# EAGLE board brakelight_V3 (EAGLE 9.5.2)
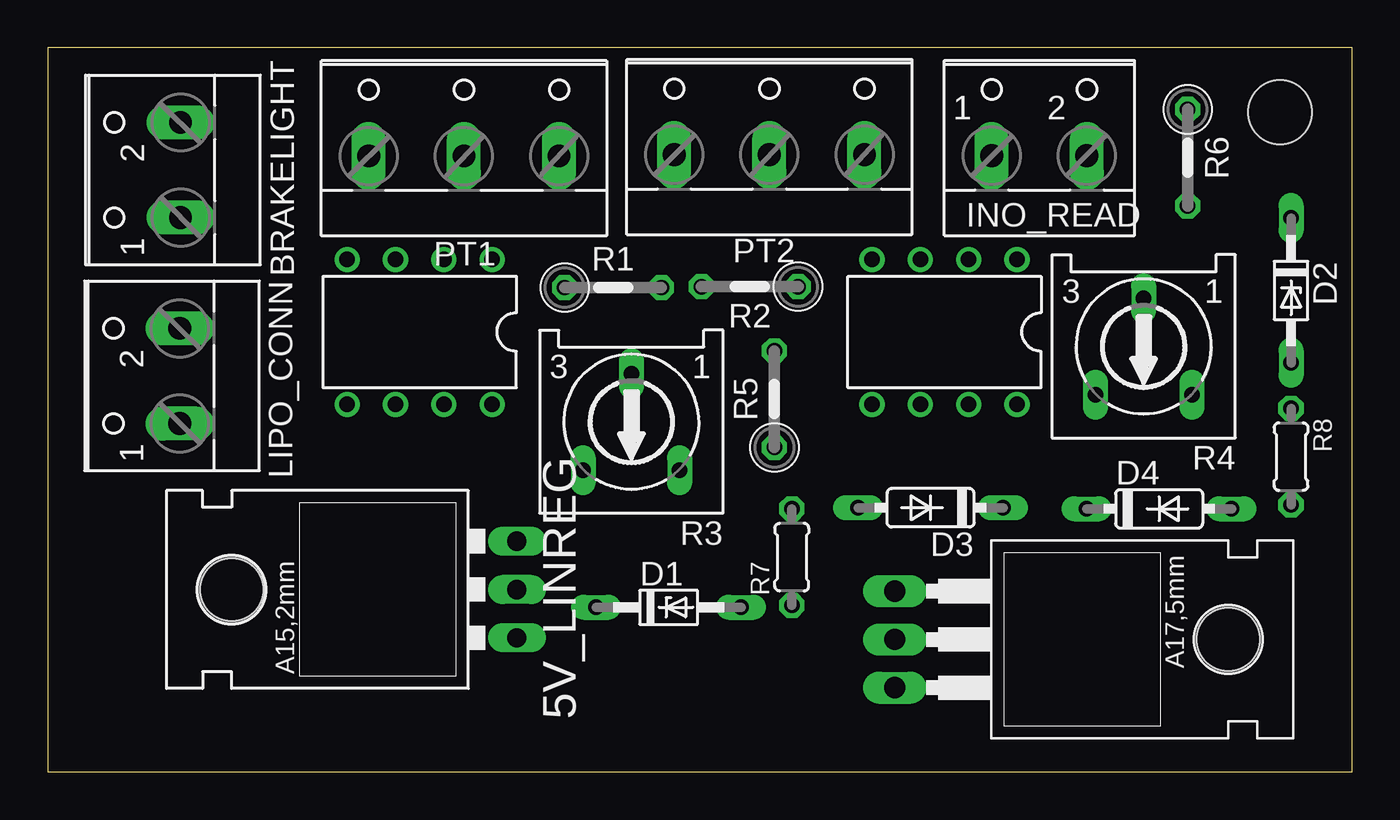
[diagram p0: board, top side]
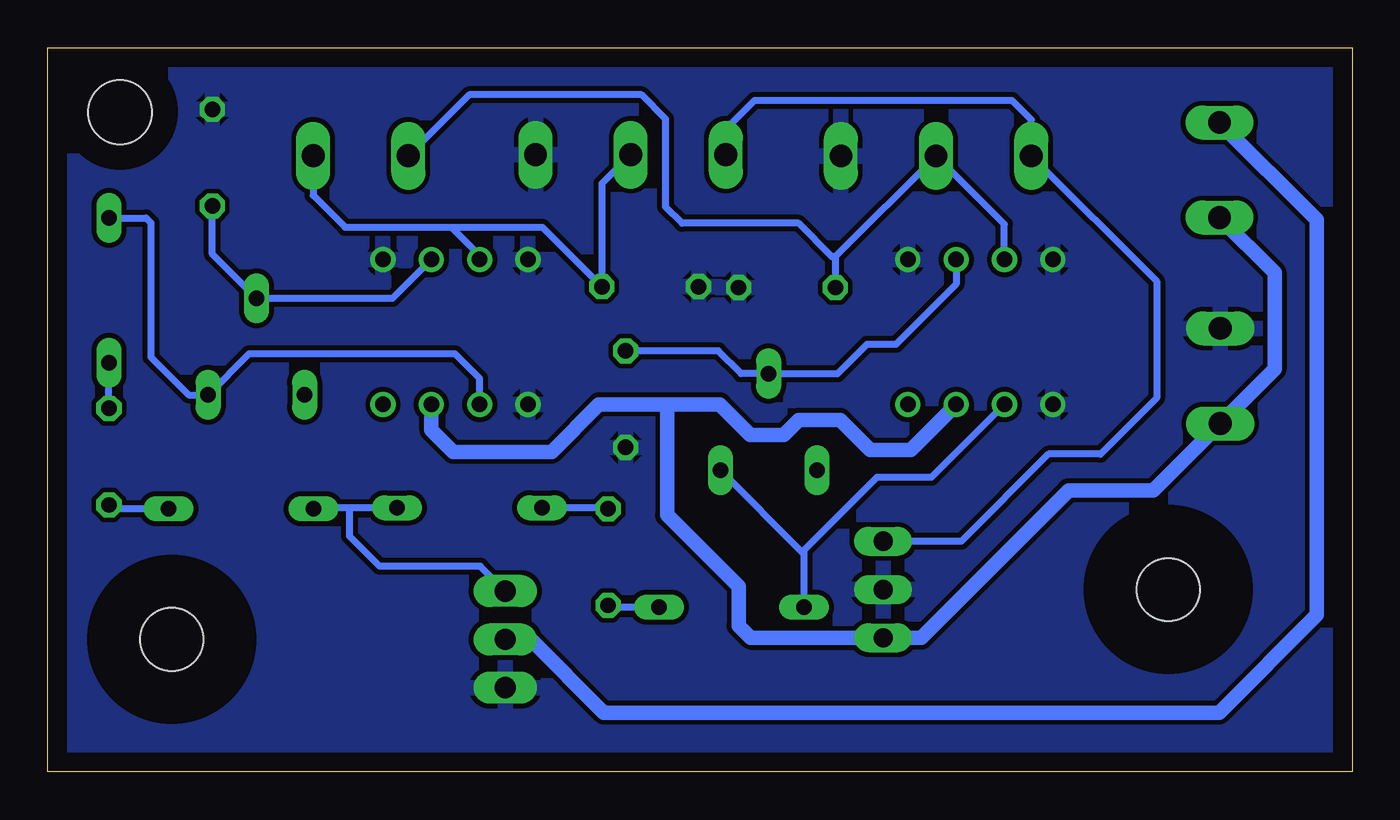
[diagram p1: board, bottom side, seen from below]

Size 68.58 x 38.1 mm. Coordinates in mm from the lower left corner, seen from the top.
Outline: 0,0 68.58,0 68.58,38.1 0,38.1 0,0
Copper layers (1*16): Top 0.035mm / dielectric 1.5mm / Bottom 0.035mm
Design rules "default": minimum track width 6mil, minimum drill 0.35mm, track to track 6mil, track to pad 6mil, pad to pad 6mil, via to via 6mil, smd to smd 6mil, copper to edge 40mil, drill to drill 6mil, minimum pad ring 10mil, minimum via ring 8mil, stop-mask expansion 4mil, vias tented up to drill 0mil, thermal gap 10mil
Holes 3.35 mm at 64.77,34.7
bRestrict: area 62,31.9 to 67.6,37.5
vRestrict: area 62,31.9 to 67.6,37.5

## Footprints (pad centres in the part's own frame; a part is rotated, then mirrored left to right if it is on the bottom)
78XXL = drill 1.016 long: GND 0,-3.81; IN -2.54,-3.81; OUT 2.54,-3.81 | hole 3.302: 0,11.176
W237-102 = drill 1.194 long: 1 -2.5,-1.27; 2 2.5,-1.27
DO34Z7 = drill 0.813 long: A 3.81,0; C -3.81,0
DO35-7 = drill 0.813 long: A 3.81,0; C -3.81,0
W237-103 = drill 1.194 long: 1 -5,-1.29; 2 0,-1.29; 3 5,-1.29
TO220 = drill 1.118 long: 1 -2.54,-6.35; 2 0,-6.35; 3 2.54,-6.35 | hole 3.302: 0,11.176
0207/5V = drill 0.813 octagon: 1 -2.54,0; 2 2.54,0
RS3 = drill 0.813 long: A -2.54,2.54; E 2.54,2.54; S 0,-2.54
0204/5 = drill 0.813 octagon: 1 -2.54,0; 2 2.54,0
DIL08 = drill 0.813 pad 1.27: 1 -3.81,-3.81; 2 -1.27,-3.81; 3 1.27,-3.81; 4 3.81,-3.81; 5 3.81,3.81; 6 1.27,3.81; 7 -1.27,3.81; 8 -3.81,3.81

## Placement (x,y rotation side)
5V_LINREG  [78XXL]  20.85,9.6 90 top
BRAKELIGHT  [W237-102]  5.72,31.66 90 top
D1  1N5231  [DO34Z7]  32.64,8.66 0 top
D2  1N5231  [DO34Z7]  65.35,25.32 270 top
D3  1N4148DO35-7  [DO35-7]  46.41,13.89 180 top
D4  1N4148DO35-7  [DO35-7]  58.42,13.84 0 top
INO_READ  [W237-102]  52.12,33.68 0 top
LIPO_CONN  [W237-102]  5.68,20.83 90 top
PT1  [W237-103]  21.88,33.69 0 top
PT2  [W237-103]  37.93,33.75 0 top
Q2  30N06L  [TO220]  50.88,6.98 270 top
R1  5.1k  [0207/5V]  29.72,25.48 0 top
R2  5.1k  [0207/5V]  36.91,25.53 180 top
R3  10k  [RS3]  30.68,18.41 180 top
R4  10k  [RS3]  57.61,22.38 180 top
R5  560  [0207/5V]  38.2,19.61 90 top
R6  560  [0207/5V]  59.92,32.31 270 top
R7  1k  [0204/5]  39.12,11.3 90 top
R8  1k  [0204/5]  65.35,16.59 270 top
U$1  LM741  [DIL08]  19.56,23.14 180 top
U$2  LM741  [DIL08]  47.14,23.14 180 top

## Library data of the parts
5V_LINREG = v-reg
BRAKELIGHT INO_READ LIPO_CONN = con-wago-500; MPN: 237-102; OC_FARNELL: unknown; OC_NEWARK: 70K9898
D1-D4 = diode
PT1 PT2 = con-wago-500; MPN: 237-103; OC_FARNELL: unknown; OC_NEWARK: 18M7116
Q2 = transistor-fet; SPICEPREFIX: Q
R1 R2 R5-R8 = 0ohmresistor; SPICEPREFIX: R
R3 R4 = pot
U$1 = GTOR
U$2 = GTOR; SPICEPREFIX: X

## Nets
5V: 5V_LINREG.OUT PT1.1 PT2.1
GND: 5V_LINREG.GND LIPO_CONN.2 PT1.3 PT2.3 Q2.3 R1.2 R2.2 R5.1 R6.1 U$1.1 U$1.4 U$1.5 U$2.1 U$2.4 U$2.5
N$1: D2.C R4.A U$2.6
N$2: BRAKELIGHT.2 Q2.2
N$3: D3.A R7.2
N$4: D4.A R8.2
N$5: D1.A R7.1
N$6: D2.A R8.1
N$7: D3.C D4.C Q2.1
N$8: D1.C R3.A U$1.6
PT1: INO_READ.1 PT1.2 R1.1 U$1.3
PT2: INO_READ.2 PT2.2 R2.1 U$2.3
THRESH1: R3.S R5.2 U$1.2
THRESH2: R4.S R6.2 U$2.2
VCC: 5V_LINREG.IN BRAKELIGHT.1 LIPO_CONN.1 U$1.7 U$2.7

## Tracks (layer width: path | path; a pad name or v marks a point on that pad's centre or on a via)
5V
  Bottom 0.381: PT2.1 32.93,33.81 31.44,35.31 17.88,35.31 16.88,34.3 PT1.1 10.29,25.8 10.29,19.66 13.23,16.71 15.98,16.71 20.55,12.14 5V_LINREG.OUT
GND
  pour Bottom (isolate 0.254): 0,38.28 68.61,38.28 68.61,-0.05 0.05,-0.05 0,0
N$1
  Bottom 0.381: U$2.6 45.87,20.7 47.17,22 57.99,22 R4.A 61.16,19.84 63.14,21.82 63.14,28.88 63.4,29.13 D2.C
N$2
  Bottom 0.762: BRAKELIGHT.2 1.88,29.05 1.88,8.26 7.01,3.12 39.34,3.12 43.2,6.98 Q2.2
N$3
  Bottom 0.381: R7.2 39.17,13.89 D3.A
N$4
  Bottom 0.381: D4.A 65.15,13.84 R8.2
N$5
  Bottom 0.381: D1.A 39.01,8.66 R7.1
N$6
  Bottom 0.381: R8.1 D2.A
N$7
  Bottom 0.381: D3.C 52.7,13.89 | Q2.1 45.83,10.82 51.13,10.82 52.7,12.39 52.7,13.89 | 52.7,13.89 54.56,13.89 D4.C
N$8
  Bottom 0.381: U$1.6 22.12,15.49 24.99,15.49 28.83,11.66 28.83,11.53 | 28.83,11.53 D1.C | R3.A 28.88,11.53 28.83,11.53
PT1
  Bottom 0.381: U$1.3 18.29,28.81 PT1.2 27.18,27.1 | 27.18,27.1 R1.1 | 27.18,27.1 27.36,27.1 29.11,28.85 35.23,28.85 36.09,29.72 36.09,34.34 37.36,35.61 46.42,35.61 INO_READ.1
PT2
  Bottom 0.381: INO_READ.2 54.62,30.33 52.94,28.65 47.37,28.65 | 47.37,28.65 45.87,27.15 U$2.3 | 47.37,28.65 42.57,28.65 R2.1 39.45,30.95 PT2.2
THRESH1
  Bottom 0.381: U$1.2 20.83,25.65 23.98,22.5 25.5,22.5 27.05,20.95 R3.S 32.13,20.95 33.33,22.15 R5.2
THRESH2
  Bottom 0.381: R6.2 59.92,27.23 R4.S 50.44,24.92 U$2.2
VCC
  Bottom 0.762: BRAKELIGHT.1 4.09,26.26 4.09,21.19 LIPO_CONN.1 10.47,14.81 14.91,14.81 22.66,7.06 5V_LINREG.IN 31.62,7.06 32.26,7.7 32.26,9.75 36.02,13.51 36.02,19.33 | 36.02,19.33 39.6,19.33 42.09,16.84 47.27,16.84 48.41,17.98 U$2.7 | 36.02,19.33 33.25,19.33 31.65,17.73 29.9,17.73 29.11,18.52 26.92,18.52 25.35,16.94 23.22,16.94 U$1.7